# Altium PCB Motherboard.PcbDoc (part 2 of 2)
Units mm, origin at the board's own origin, x right, y up, seen from the top; angles counter-clockwise.
Board outline 237.88 x 115.44 mm, 4 copper layers (Top Layer, GND, 3V3, Bottom Layer), stack 0.603 mm thick; 165 components, 86 nets, 532 pads, 772 vias.
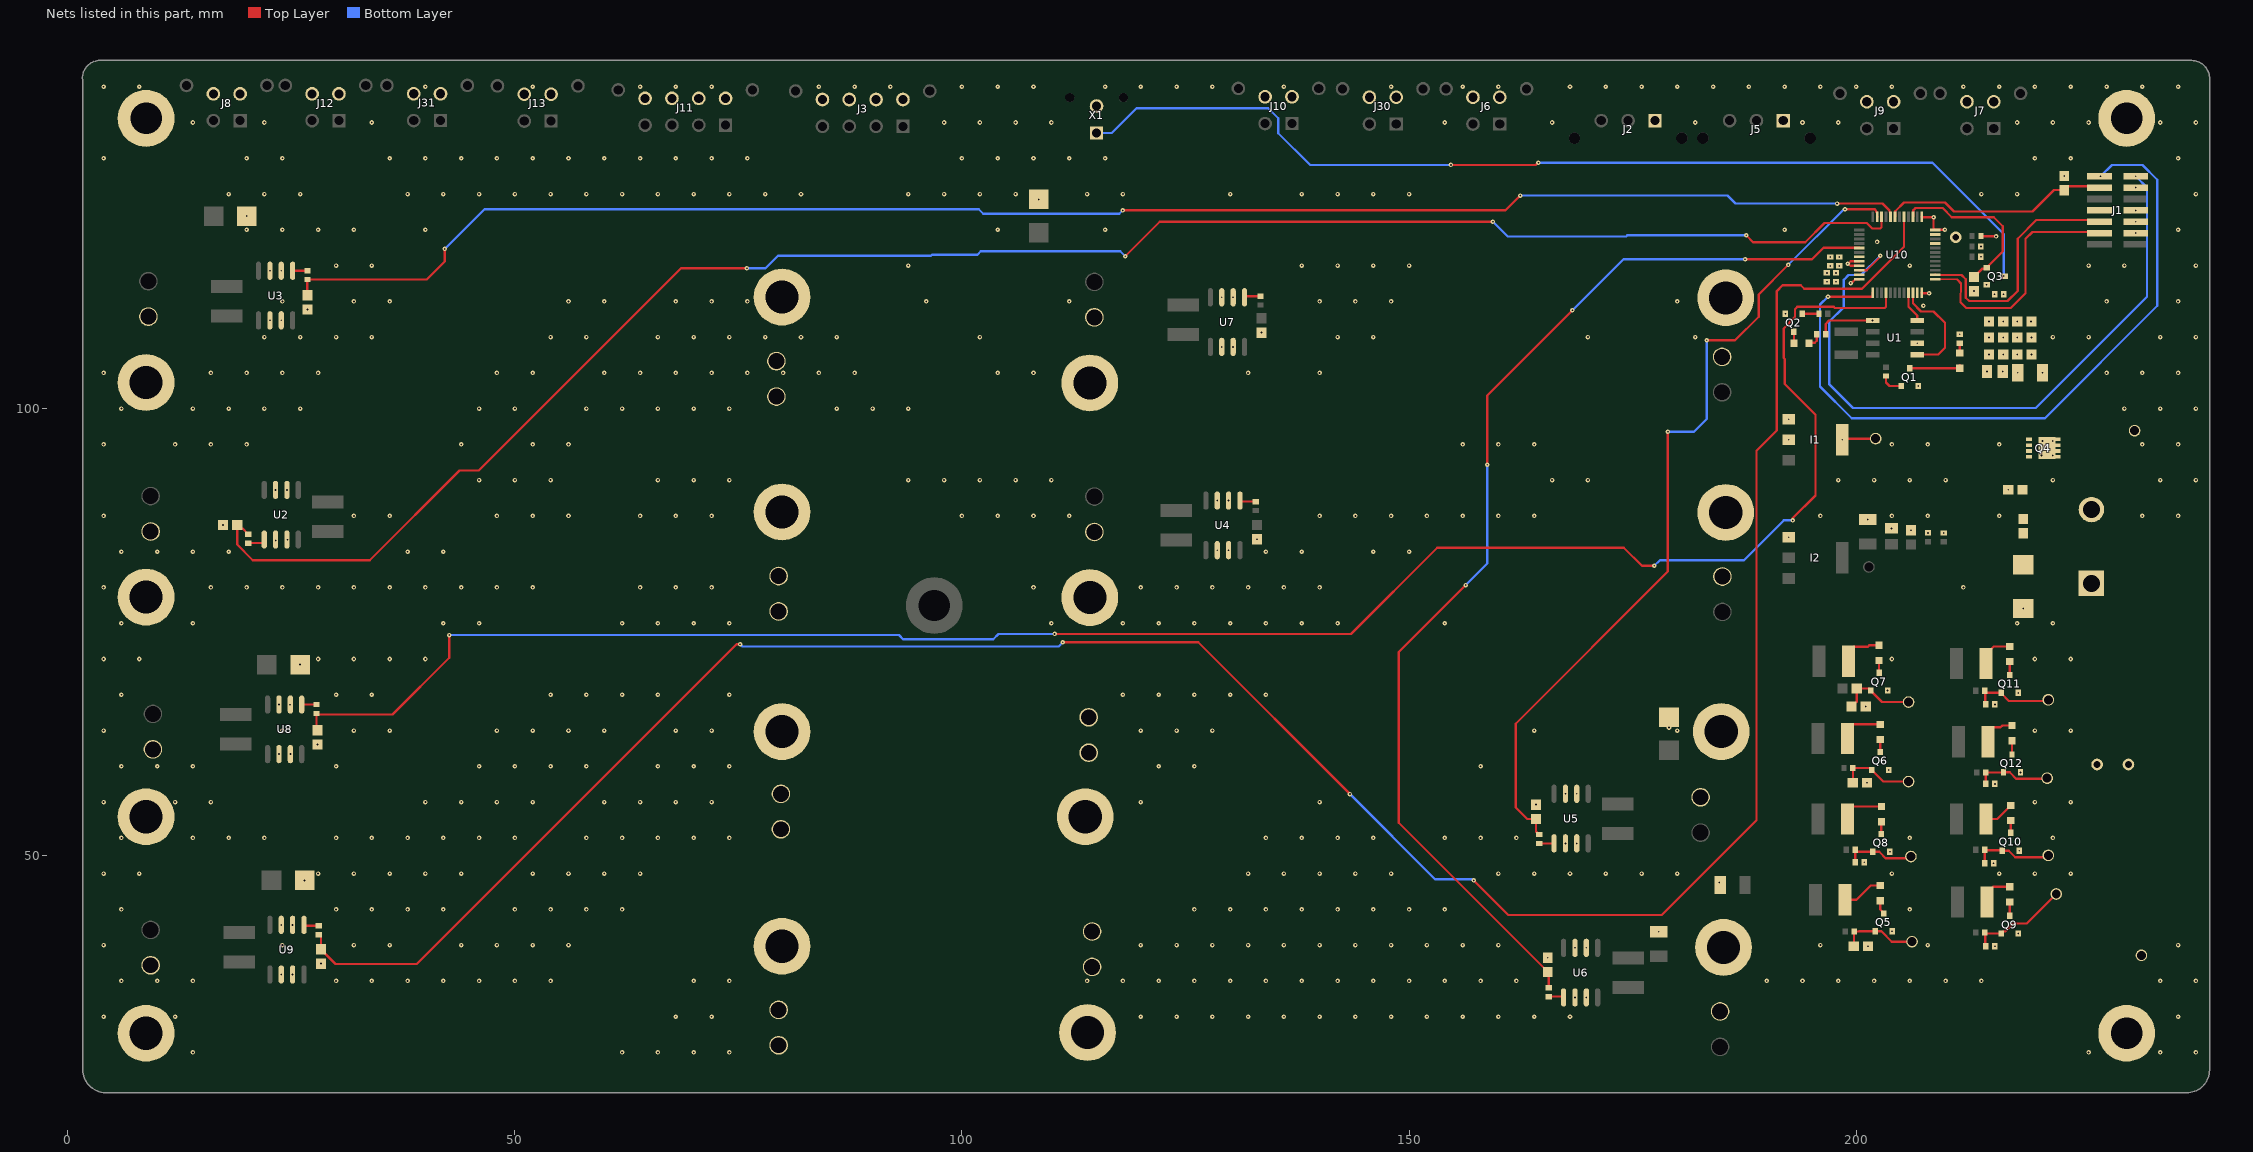
[diagram p4: the nets of this part, all layers, seen from the top]

## Via types
v1: diameter 0.506, hole 0.206, Top Layer to Bottom Layer, 533 vias
v2: diameter 0.508, hole 0.203, Top Layer to Bottom Layer, 204 vias
v3: diameter 1.27, hole 0.7, Top Layer to Bottom Layer, 34 vias
v4: diameter 1.27, hole 0.711, Top Layer to Bottom Layer, 1 vias

## Nets (pads, with @x,y where several pads share a name; then routed paths per layer and width w, separated by ;. In a path a pad name is that pad's centre, name@x,y a point inside that pad or via, vN(x,y) a via of type N, cw(c..) or ccw(c..) an arc to the next point about the centre after c; other vN are vias at no path point) (continued)
CURR_7V_BUCK: C5.1 R16.2 U10.17 | length 125.7
  Top Layer w0.254: v2(156.337,80.264) 148.844,72.771 148.844,53.683 165.506,37.021 C5.1@165.506,36.996 165.633,36.869 R16.2@165.633,35.248 ; v2(158.75,93.726) 158.75,101.473 v2(168.275,110.998) ; v2(187.579,116.713) 195.072,116.713 196.342,117.983 200.335,117.983 U10.17@200.347,117.971
  Bottom Layer w0.254: v2(156.337,80.264) 158.75,82.677 v2(158.75,93.726) ; v2(168.275,110.998) 173.99,116.713 v2(187.579,116.713)
CURR_12V_BUCK: C4.1 R15.2 U10.11 | length 94.8
  Top Layer w0.254: R15.2@164.567,52.369 164.517,52.369 164.186,52.7 C4.1@164.186,54.117 163.205,54.117 161.925,55.397 161.925,64.77 178.943,81.788 v2(178.943,97.409) ; v2(183.286,107.646) 186.461,107.646 189.103,110.288 189.103,112.776 v2(192.405,116.078) ; v2(198.755,122.301) 202.09,122.301 202.228,122.163 202.228,122.034 202.322,121.941 202.322,121.496 U10.11@202.347,121.471
  Bottom Layer w0.254: v2(178.943,97.409) 181.864,97.409 183.286,98.831 v2(183.286,107.646) ; v2(192.405,116.078) 198.579,122.252 198.706,122.252 v2(198.755,122.301)
CURR_12V_BUCK_FANS: C8.1 R20.2 U10.28 | length 218.3
  Top Layer w0.254: C8.1@27.94,64.046 27.813,64.173 R20.2@27.813,65.913 27.94,65.786 36.322,65.786 42.672,72.136 v2(42.672,74.676) ; v2(110.363,74.803) 116.691,74.803 143.51,74.803 153.162,84.455 174.023,84.455 176.055,82.423 v2(177.419,82.423) ; v2(192.913,87.503) 192.913,87.757 195.453,90.297 195.453,99.314 192.024,102.743 192.024,105.537 191.897,105.664 191.897,108.966 193.167,110.236 193.167,111.125 193.421,111.379 197.485,111.379 197.612,111.252 203.198,111.252 203.347,111.401 U10.28@203.347,112.971
  Bottom Layer w0.254: v2(42.672,74.676) 92.964,74.676 93.42,74.22 103.49,74.22 104.074,74.803 v2(110.363,74.803) ; v2(177.419,82.423) 178.054,83.058 187.452,83.058 191.897,87.503 v2(192.913,87.503)
CURR_18V_BUCK: C2.1 R10.2 U10.8 | length 185.2
  Top Layer w0.254: C2.1@26.797,112.687 26.797,114.427 R10.2@26.797,114.435 40.14,114.435 42.164,116.459 v2(42.164,117.856) ; v2(117.983,122.174) 160.782,122.174 v2(162.433,123.825) ; v2(197.866,122.936) 202.955,122.936 203.728,122.163 203.728,122.034 203.822,121.941 203.822,121.496 U10.8@203.847,121.471
  Bottom Layer w0.254: v2(42.164,117.856) 46.609,122.301 101.883,122.301 102.391,121.793 117.602,121.793 v2(117.983,122.174) ; v2(162.433,123.825) 185.605,123.825 186.494,122.936 v2(197.866,122.936)
CURR_24V_BUCK: C1.1 R9.2 U10.10 | length 208
  Top Layer w0.254: C1.1@18.961,86.868 19.232,86.597 19.559,86.597 R9.2@20.193,85.963 ; C1.1@18.961,86.995 18.951,86.985 18.951,84.808 20.701,83.058 33.782,83.058 43.815,93.091 45.974,93.091 68.58,115.697 v2(75.946,115.697) ; v2(118.262,117.044) 122.122,120.904 v2(159.385,120.904) ; v2(187.706,119.38) 188.468,118.618 194.31,118.618 196.458,120.766 201.179,120.766 201.803,120.142 202.692,120.142 202.847,120.297 U10.10@202.847,121.471
  Bottom Layer w0.254: v2(75.946,115.697) 78.041,115.697 79.438,117.094 96.52,117.094 96.647,117.221 101.727,117.221 102.108,117.602 117.704,117.602 v2(118.262,117.044) ; v2(159.385,120.904) 161.036,119.253 174.273,119.253 174.4,119.38 v2(187.706,119.38)
CURR_24V_BUCK_LA: C7.1 R21.2 U10.5 | length 275.2
  Top Layer w0.254: R21.2@28.067,41.156 28.117,41.156 28.321,40.952 C7.1@28.321,39.535 28.321,39.51 29.947,37.884 39.027,37.884 74.798,73.655 75.179,73.655 v2(75.184,73.66) ; v2(111.277,73.864) 126.415,73.864 v2(143.383,56.896) ; v2(157.226,47.244) 161.086,43.384 178.258,43.384 188.849,53.975 188.849,95.294 191.135,97.58 191.135,113.152 191.775,113.792 193.802,113.792 194.183,113.411 200.66,113.411 205.359,118.11 205.359,121.459 U10.5@205.347,121.471
  Bottom Layer w0.254: v2(75.184,73.66) 75.206,73.66 75.46,73.406 110.819,73.406 v2(111.277,73.864) ; v2(143.383,56.896) 152.905,47.374 157.027,47.374 157.157,47.244 v2(157.226,47.244)
FDCAN_RX: U1.4 U10.33 | length 3.5
  Top Layer w0.254: U10.33@205.847,112.971 205.847,111.399 206.843,110.403 U1.4@206.843,109.855
FDCAN_TX: U1.1 U10.34 | length 11.9
  Top Layer w0.254: U10.34@206.347,112.971 206.347,111.788 207.264,110.871 208.661,110.871 209.931,109.601 209.931,106.807 209.169,106.045 U1.1@206.843,106.045
GND: C1.2 C2.2 C3.2 C4.2 C5.2 C6.2 C7.2 C8.2 C9.1 C10.1 C11.1 C12.1 C13.1 C14.1 C15.1 C16.1 C17.1 C18.1 C19.1 C20.1 C21.1 C22.1 C23.1 C24.1 C25.1 C26.1 C27.1 C28.1 C29.1 C30.2 D3.2 D12.2 D13.2 D14.2 D15.2 D16.2 GND.1 I1.1 I2.1 J1.05 J1.07 J1.11 J2.P$1 J3.5 J3.6 J3.7 J3.8 J5.P$1 J6.3 J6.4 J7.3 J7.4 J8.3 J8.4 J9.3 J9.4 J10.3 J10.4 J11.5 J11.6 J11.7 J11.8 J12.3 J12.4 J13.3 J13.4 J14.2 J15.2 J16.2 J17.2 J18.2 J19.2 J20.2 J21.2 J22.2 J23.2 J24.2 J25.2 J26.2 J27.2 J28.2 J29.2 J30.3 J30.4 J31.3 J31.4 pad.3@8.763,30.149 pad.3@8.763,54.355 pad.3@8.763,78.918 pad.3@8.763,102.921 pad.3@8.763,132.461 pad.3@79.883,39.877 pad.3@79.883,63.88 pad.3@79.883,88.443 pad.3@79.883,112.471 pad.3@113.792,54.356 pad.3@114.3,78.867 pad.3@114.3,102.87 pad.3@114.046,30.226 pad.3@184.912,63.881 pad.3@185.42,88.392 pad.3@185.42,112.395 pad.3@185.166,39.751 pad.3@230.251,30.149 pad.3@230.251,132.461 Q1.2 Q2.2 Q3.2 Q4.3 Q5.2 Q6.2 Q7.2 Q8.2 Q9.2 Q10.2 Q11.2 Q12.2 R22.1 R27.2 R36.1 R37.1 R38.1 R39.1 R48.1 R49.1 R50.1 R51.1 U1.2 U2.2 U2.3 U3.2 U3.3 U4.2 U4.3 U5.2 U5.3 U6.2 U6.3 U7.2 U7.3 U8.2 U8.3 U9.2 U9.3 U10.19 U10.23 U10.35 U10.45 U10.47 X1.P$2 | length 0.2
  Top Layer w0.254: Q2.2@192.09,110.601 Q2.2@192.12,110.632 ; v2(214.592,113.854) Q3.2@214.608,113.87 Q3.2@214.73,113.749
  other v1: 14,28 62,28 66,28 70,28 74,28 226,28 234,28 238,28 4,32 12,32 68,32 72,32 120,32 124,32 128,32 132,32 136,32 140,32 144,32 148,32 152,32 156,32 160,32 164,32 168,32 236,32 6,36 10,36 14,36 30,36 34,36 38,36 42,36 46,36 50,36 54,36 70,36 74,36 114,36 118,36 122,36 126,36 130,36 134,36 138,36 142,36 146,36 150,36 154,36 158,36 162,36 190,36 194,36 198,36 202,36 206,36 210,36 214,36 234,36 238,36 4,40 24,40 32,40 36,40 44,40 48,40 52,40 56,40 120,40 124,40 128,40 132,40 136,40 140,40 144,40 148,40 152,40 156,40 160,40 196,40 208,40 236,40 6,44 30,44 34,44 38,44 42,44 50,44 54,44 58,44 62,44 126,44 130,44 134,44 138,44 142,44 146,44 150,44 154,44 206,44 4,48 8,48 28,48 32,48 36,48 40,48 44,48 52,48 56,48 60,48 64,48 132,48 136,48 140,48 144,48 148,48 160,48 164,48 168,48 172,48 176,48 180,48 204,48 216,48 220,48 224,48 6,52 14,52 18,52 22,52 30,52 34,52 38,52 42,52 46,52 50,52 58,52 62,52 66,52 70,52 74,52 134,52 138,52 142,52 146,52 154,52 158,52 162,52 206,52 222,52 4,56 12,56 16,56 40,56 44,56 48,56 52,56 60,56 64,56 68,56 72,56 120,56 140,56 220,56 224,56 6,60 10,60 14,60 30,60 46,60 50,60 54,60 58,60 66,60 70,60 74,60 122,60 126,60 158,60 4,64 24,64 32,64 36,64 48,64 52,64 56,64 60,64 68,64 72,64 120,64 124,64 128,64 164,64 180,64 220,64 224,64 6,68 30,68 34,68 54,68 58,68 62,68 66,68 74,68 118,68 122,68 126,68 130,68 134,68 4,72 8,72 28,72 32,72 36,72 40,72 204,72 220,72 224,72 6,76 14,76 42,76 46,76 62,76 66,76 70,76 74,76 110,76 118,76 122,76 126,76 130,76 134,76 138,76 142,76 154,76 218,76 222,76 4,80 16,80 20,80 24,80 28,80 32,80 36,80 40,80 44,80 48,80 52,80 64,80 68,80 72,80 108,80 120,80 124,80 128,80 132,80 136,80 140,80 212,80 6,84 10,84 14,84 18,84 38,84 42,84 134,84 138,84 146,84 150,84 4,88 32,88 36,88 48,88 52,88 56,88 64,88 68,88 72,88 100,88 104,88 108,88 112,88 140,88 144,88 148,88 152,88 156,88 160,88 164,88 196,88 204,88 208,88 216,88 232,88 236,88 46,92 50,92 54,92 66,92 70,92 74,92 94,92 98,92 102,92 106,92 110,92 166,92 170,92 198,92 202,92 206,92 210,92 222,92 234,92 238,92 4,96 12,96 16,96 20,96 44,96 52,96 56,96 156,96 160,96 164,96 204,96 208,96 216,96 232,96 236,96 6,100 14,100 18,100 22,100 26,100 46,100 50,100 58,100 62,100 66,100 70,100 74,100 86,100 90,100 94,100 230,100 234,100 238,100 4,104 16,104 20,104 24,104 28,104 48,104 52,104 60,104 64,104 68,104 72,104 76,104 80,104 84,104 88,104 104,104 108,104 132,104 140,104 228,104 232,104 236,104 22,108 26,108 30,108 34,108 54,108 58,108 66,108 70,108 74,108 78,108 82,108 86,108 102,108 142,108 146,108 170,108 182,108 222,108 226,108 234,108 238,108 24,112 32,112 36,112 56,112 60,112 68,112 72,112 76,112 96,112 112,112 140,112 144,112 148,112 180,112 228,112 236,112 30,116 34,116 94,116 138,116 142,116 146,116 150,116 206,116 226,116 230,116 238,116 20,120 24,120 28,120 32,120 40,120 104,120 116,120 192,120 236,120 18,124 22,124 26,124 38,124 42,124 46,124 50,124 54,124 58,124 62,124 66,124 70,124 74,124 78,124 82,124 94,124 98,124 102,124 106,124 114,124 118,124 130,124 138,124 142,124 146,124 150,124 214,124 218,124 238,124 4,128 20,128 24,128 36,128 40,128 44,128 48,128 52,128 56,128 60,128 64,128 68,128 72,128 76,128 100,128 104,128 108,128 112,128 116,128 220,128 224,128 236,128 14,132 22,132 34,132 98,132 102,132 106,132 110,132 154,132 166,132 182,132 194,132 198,132 218,132 222,132 226,132 234,132 238,132 4,136 8,136 40,136 52,136 64,136 68,136 72,136 84,136 88,136 92,136 100,136 104,136 108,136 116,136 120,136 124,136 128,136 136,136 148,136 156,136 160,136 168,136 172,136 176,136 180,136 184,136 188,136 192,136 196,136 200,136 204,136 212,136 216,136 220,136 224,136 228,136 232,136 236,136
  other v2: 23.876,36.725 25.146,36.725 28.321,37.935 165.506,38.596 168.554,39.701 169.824,39.701 201.333,39.878 215.511,39.878 218.12,41.291 177.927,41.507 204.023,41.545 184.68,46.99 26.492,47.244 215.376,49.149 200.906,49.276 203.769,50.435 218.247,50.562 164.186,55.717 167.488,56.927 168.758,56.927 215.511,58.039 201.206,58.166 218.374,59.325 203.642,59.595 23.622,61.363 24.892,61.363 27.94,62.446 179.07,64.338 201.079,66.675 215.511,66.929 218.12,68.215 203.515,68.469 25.984,71.374 218.694,77.653 128.549,84.173 129.819,84.173 132.994,85.383 192.453,85.612 208.026,86.106 209.804,86.098 206.121,86.398 203.962,86.605 17.361,86.995 201.295,87.608 23.241,90.91 24.511,90.91 217.005,90.932 220.726,94.742 221.996,94.742 221.369,95.59 220.853,96.393 221.996,96.393 192.453,98.82 206.944,102.521 220.831,104.013 214.639,104.14 214.846,106.045 219.621,106.045 129.057,106.906 130.327,106.906 206.843,107.315 214.846,107.95 219.621,107.95 133.502,108.497 214.846,109.728 219.561,109.745 22.606,109.877 23.876,109.877 192.105,110.616 26.797,111.087 207.518,111.506 215.49,112.788 213.195,113.157 196.723,114.181 197.739,114.181 197.104,116.959 198.12,116.959 202.335,118.642 231.27,120.904 20.015,121.539 231.27,122.174 108.585,123.393 231.27,124.714 223.266,126.022
  other v4: 211.156,119.171
Net3V3_1: 3V3.1 R43.1 | length 4
  Top Layer w0.254: R43.1@214.756,62.738 214.756,63.763 215.354,64.361 216.15,64.361 216.355,64.567 3V3.1@217.424,64.567
Net3V3_2: 3V3.2 Q12.3 | length 1.5
  Top Layer w0.254: Q12.3@217.424,61.325 3V3.2@217.424,62.865
Net5V_1: 5V.1 R42.1 | length 4.1
  Top Layer w0.254: R42.1@214.502,71.501 214.502,72.526 215.382,73.406 5V.1@217.17,73.406
Net5V_2: 5V.2 Q11.3 | length 1.5
  Top Layer w0.254: Q11.3@217.17,70.215 5V.2@217.17,71.704
Net7V_1: 7V.1 R40.1 | length 3.8
  Top Layer w0.254: R40.1@214.629,44.831 214.629,45.856 215.306,46.533 7V.1@217.17,46.533
Net7V_2: 7V.2 Q9.3 | length 1.5
  Top Layer w0.254: Q9.3@217.17,43.291 7V.2@217.17,44.831
Net12V-0_1: 12V.1 R31.1 | length 4.9
  Top Layer w0.254: R31.1@199.008,54.102 199.008,54.901 199.606,55.499 12V.1@202.819,55.499
Net12V-0_2: 12V.2 Q8.3 | length 1.4
  Top Layer w0.254: Q8.3@202.819,52.435 12V.2@202.819,53.797
Net12V-1_1: 12V-1.1 R41.1 | length 3.4
  Top Layer w0.254: R41.1@214.502,54.102 215.773,54.102 12V-1.1@217.297,55.626
Net12V-1_2: 12V-1.2 Q10.3 | length 1.4
  Top Layer w0.254: Q10.3@217.297,52.562 12V-1.2@217.297,53.924
Net18V_1: 18V.1 R30.1 | length 4.8
  Top Layer w0.254: R30.1@199.135,71.755 199.135,72.78 199.733,73.378 201.316,73.378 201.471,73.533 18V.1@202.565,73.533
Net18V_2: 18V.2 Q7.3 | length 1.4
  Top Layer w0.254: Q7.3@202.565,70.469 18V.2@202.565,71.831
Net24V-0_1: 24V.1 R28.1 | length 4.6
  Top Layer w0.254: R28.1@198.754,45.085 200.048,45.085 201.623,46.66 24V.1@202.692,46.66
Net24V-0_2: 24V.2 Q5.3 | length 1.6
  Top Layer w0.254: 24V.2@202.692,44.958 202.692,43.976 203.073,43.595 Q5.3@203.073,43.545
Net24V-1_1: 24V-1.1 R29.1 | length 4.7
  Top Layer w0.254: R29.1@199.008,63.373 199.008,64.096 199.606,64.694 24V-1.1@202.692,64.694
Net24V-1_2: 24V-1.2 Q6.3 | length 1.4
  Top Layer w0.254: Q6.3@202.692,61.595 24V-1.2@202.692,62.992
NetJ4_2: J4.2 Q4.2
NetQ1_1: Q1.1 R1.1 | length 2.6
  Top Layer w0.254: R1.1@203.327,103.648 203.327,102.935 203.741,102.521 Q1.1@205.044,102.521
NetQ1_3: Q1.3 TX.2 | length 5.7
  Top Layer w0.254: Q1.3@205.994,104.505 211.236,104.505 TX.2@211.582,104.851
NetQ2_1: Q2.1 R2.1 | length 1.8
  Top Layer w0.254: Q2.1@194.036,110.617 R2.1@195.842,110.617
NetQ2_3: Q2.3 RX.2 | length 1.2
  Top Layer w0.254: RX.2@193.04,107.315 Q2.3@193.04,108.525
NetQ4_1: Q4.1 R26.2 R27.1
NetR4_1: R4.1 TX.1 | length 1.1
  Top Layer w0.254: TX.1@211.582,106.223 R4.1@211.582,107.323
NetR5_1: R5.1 RX.1 | length 1.9
  Top Layer w0.254: RX.1@194.742,107.315 194.79,107.363 195.374,107.363 195.596,107.585 R5.1@195.596,108.323 ; R5.1@195.588,108.196 R5.1@195.715,108.069
NetR9_1: R9.1 U2.5 | length 1.8
  Top Layer w0.254: R9.1@20.193,84.963 21.817,84.963 U2.5@21.971,85.117
NetR10_1: R10.1 U3.5 | length 1.7
  Top Layer w0.254: U3.5@25.146,115.421 25.16,115.435 R10.1@26.797,115.435
NetR11_1: R11.1 U4.5 | length 1.8
  Top Layer w0.254: U4.5@131.089,89.717 131.202,89.604 R11.1@132.867,89.604
NetR15_1: R15.1 U5.5 | length 1.7
  Top Layer w0.254: R15.1@164.567,51.369 166.204,51.369 U5.5@166.218,51.382
NetR16_1: R16.1 U6.5 | length 1.7
  Top Layer w0.254: R16.1@165.633,34.248 167.192,34.248 U6.5@167.284,34.156
NetR17_1: R17.1 U7.5 | length 1.8
  Top Layer w0.254: U7.5@131.597,112.45 131.73,112.583 R17.1@133.375,112.583
NetR20_1: R20.1 U8.5 | length 1.7
  Top Layer w0.254: U8.5@26.162,66.907 26.168,66.913 R20.1@27.813,66.913
NetR21_1: R21.1 U9.5 | length 1.7
  Top Layer w0.254: U9.5@26.416,42.269 26.529,42.156 R21.1@28.067,42.156
NRST: C29.2 J1.12 U10.7 | length 25.5
  Top Layer w0.254: U10.7@204.347,121.471 204.372,121.496 204.372,122.076 205.359,123.063 209.931,123.063 210.947,122.047 219.71,122.047 222.123,124.46 C29.2@223.266,124.46 ; C29.2@223.266,124.422 223.266,124.447 223.689,124.87 227.044,124.87 J1.12@227.2,124.714
PGOOD_0: PG0.1 Q5.1 R32.1 R36.2 | length 8.6
  Top Layer w0.254: R36.2@199.733,39.878 199.771,39.916 R32.1@199.771,41.529 200.317,41.529 200.333,41.545 Q5.1@202.123,41.545 202.834,41.545 203.993,40.386 PG0.1@206.248,40.386
PGOOD_1: PG1.1 Q6.1 R33.1 R37.2 | length 8.6
  Top Layer w0.254: R37.2@199.606,58.166 199.636,58.196 R33.1@199.636,59.817 201.569,59.817 201.742,59.644 Q6.1@201.742,59.595 201.742,59.545 201.915,59.372 201.965,59.372 203.044,58.293 PG1.1@205.867,58.293
PGOOD_2: PG2.1 Q7.1 R34.1 R38.2 | length 8.8
  Top Layer w0.254: R38.2@199.479,66.675 199.504,66.675 200.063,67.234 R34.1@200.063,68.707 201.427,68.707 201.615,68.519 Q7.1@201.615,68.469 201.615,68.419 201.788,68.246 201.838,68.246 202.901,67.183 PG2.1@205.867,67.183
PGOOD_3: PG3.1 Q8.1 R35.1 R39.2 | length 8.1
  Top Layer w0.254: R35.1@199.89,50.623 200.063,50.45 200.113,50.45 200.128,50.435 Q8.1@201.869,50.435 202.58,50.435 203.311,49.704 205.631,49.704 205.838,49.911 PG3.1@206.121,49.911 ; R35.1@199.89,50.673 199.898,50.665 199.898,49.284 R39.2@199.906,49.276
PGOOD_4: PG4.1 Q9.1 R44.1 R48.2 | length 11.4
  Top Layer w0.254: R44.1@214.368,41.402 214.368,41.352 R44.1@214.439,41.28 ; R44.1@214.492,41.227 R44.1@214.439,41.28 ; R48.2@214.511,39.878 214.439,39.95 214.439,41.164 R44.1@214.439,41.28 ; R44.1@214.556,41.291 Q9.1@216.22,41.291 216.22,41.341 216.393,41.514 216.647,41.514 217.551,42.418 219.075,42.418 PG4.1@222.415,45.758
PGOOD_5: PG5.1 Q10.1 R46.1 R49.2 | length 9.1
  Top Layer w0.254: R49.2@214.376,49.149 214.372,49.153 214.372,50.669 R46.1@214.368,50.673 214.423,50.618 216.291,50.618 Q10.1@216.347,50.562 217.058,50.562 217.789,49.831 220.998,49.831 221.205,50.038 PG5.1@221.488,50.038
PGOOD_6: PG6.1 Q11.1 R45.1 R50.2 | length 9.2
  Top Layer w0.254: R45.1@214.368,68.403 214.556,68.215 Q11.1@216.22,68.215 ; R45.1@214.368,68.453 214.439,68.381 214.439,67.001 R50.2@214.511,66.929 ; Q11.1@216.22,68.165 217.075,67.31 221.361,67.31 PG6.1@221.488,67.437
PGOOD_7: PG7.1 Q12.1 R47.1 R51.2 | length 8.5
  Top Layer w0.254: R51.2@214.511,58.039 214.503,58.047 214.503,59.301 R47.1@214.495,59.309 214.503,59.317 216.466,59.317 Q12.1@216.474,59.325 217.185,59.325 217.916,58.594 221.281,58.594 PG7.1@221.361,58.674
RA_LASER_GND: Q3.3 X1.P$1 | length 114.3
  Top Layer w0.254: v2(154.686,127.254) 164.142,127.254 164.396,127.508 v2(164.465,127.508)
  Bottom Layer w0.254: X1.P$1@115.053,130.836 116.739,130.836 119.507,133.604 134.239,133.604 135.382,132.461 135.382,130.81 138.938,127.254 v2(154.686,127.254) ; v2(164.465,127.508) 208.534,127.508 216.504,119.538 v2(216.504,114.848)
RA_LASER_MCU: Q3.1 R22.2 U10.3 | length 19
  Top Layer w0.254: U10.3@206.347,121.471 206.372,121.496 206.372,122.171 206.629,122.428 209.677,122.428 210.693,121.412 215.392,121.412 216.408,120.396 216.408,117.57 214.832,115.993 214.832,115.943 Q3.1@214.585,115.697 ; R22.2@213.195,114.731 213.195,114.756 214.069,115.63 214.468,115.63 Q3.1@214.608,115.77
STLINK_RX: J1.13 U10.22 | length 76.4
  Top Layer w0.254: U10.22@200.347,115.471 201.196,115.471 202.643,116.918 202.643,117.045 v2(202.692,117.094)
  Bottom Layer w0.254: v2(202.692,117.094) 200.533,114.935 199.136,114.935 198.628,114.427 198.628,111.379 196.977,109.728 196.977,102.743 199.644,100.076 220.091,100.076 232.514,112.499 232.514,124.737 v2(231.267,125.984)
STLINK_TX: J1.14 U10.25 | length 81.9
  Top Layer w0.254: v2(196.85,112.522) 201.822,112.522 201.847,112.547 U10.25@201.847,112.971
  Bottom Layer w0.254: v2(196.85,112.522) 195.961,111.633 195.961,102.489 199.517,98.933 221.107,98.933 233.68,111.506 233.68,125.603 232.029,127.254 228.6,127.254 v2(227.33,125.984)
SWCLK: J1.06 U10.38 | length 28
  Top Layer w0.254: U10.38@208.847,114.971 209.317,114.95 211.796,114.95 212.264,114.481 212.264,112.399 212.637,112.026 216.928,112.026 218.059,113.157 218.059,118.999 220.154,121.094 227.01,121.094 J1.06@227.2,120.904
SWDIO: J1.04 U10.37 | length 28.1
  Top Layer w0.254: U10.37@208.848,114.5 211.304,114.432 ; 211.305,114.446 211.729,113.997 211.672,111.903 212.323,111.252 217.297,111.252 218.948,112.903 218.948,118.999 219.71,119.761 227.073,119.761 J1.04@227.2,119.634
SWO: J1.08
VBAT: C30.1 D3.1 J4.1 J18.1 J19.1 J21.1 J26.1 J27.1 J28.1 R26.1 VBAT.1
VBAT_MCU: 3V3_LDO.1 C14.2 C17.2 C18.2 C19.2 C20.2 C21.2 C22.2 C23.2 C24.2 C25.2 C26.2 C27.2 C28.2 I1.2 I1.4 J1.03 R4.2 R5.2 R23.2 R24.2 R25.2 U1.5 U2.6 U2.7 U3.6 U3.7 U4.6 U4.7 U5.6 U5.7 U6.6 U6.7 U7.6 U7.7 U8.6 U8.7 U9.6 U9.7 U10.1 U10.20 U10.21 U10.24 U10.36 U10.48 | length 20.7
  Top Layer w0.254: R5.2@196.596,108.323 196.596,109.474 196.977,109.855 v2(201.843,109.855) ; v2(198.453,96.52) 198.58,96.647 3V3_LDO.1@202.184,96.647 ; v2(199.06,116.205) 199.129,116.205 199.363,115.971 U10.21@200.347,115.971 ; v2@199.136,116.205 199.402,116.471 U10.20@200.347,116.471 ; v2(199.39,114.046) 199.439,114.095 199.526,114.095 199.903,114.471 U10.24@200.347,114.471 ; U10.36@207.347,112.971 207.347,112.928 207.372,112.903 v2(208.153,112.903) ; U10.1@207.347,121.471 207.347,121.437 207.372,121.412 v2(208.661,121.412) 208.661,120.182 208.828,120.015 v2(209.931,120.015) ; R23.2@213.957,119.294 213.978,119.274 215.625,119.274 v2(215.646,119.253)
  other v2: 168.554,34.156 169.824,34.156 23.876,42.269 25.146,42.269 167.488,51.382 168.758,51.382 24.837,66.881 23.622,66.907 23.266,85.237 24.567,85.342 128.549,89.717 129.819,89.717 192.453,96.52 218.081,104.013 216.399,104.14 216.446,106.045 218.021,106.045 216.446,107.95 218.021,107.95 211.582,108.323 216.446,109.728 218.021,109.728 129.057,112.45 130.327,112.45 216.489,112.788 196.723,115.181 197.751,115.181 22.606,115.421 23.876,115.421 197.104,115.959 198.12,115.959 213.949,116.979 213.949,118.137 231.27,119.634
pads on no net: J1.01 J1.02 J1.09 J1.10 J2.1 J3. J5.1 J6.1@154.147,135.766 J6.1@163.147,135.766 J7.1@209.392,135.258 J7.1@218.392,135.258 J8.1@13.28,136.147 J8.1@22.28,136.147 J9.1@198.192,135.258 J9.1@207.192,135.258 J10.1@130.906,135.814 J10.1@139.906,135.814 J11. J12.1@24.329,136.147 J12.1@33.329,136.147 J13.1@48.054,136.099 J13.1@57.054,136.099 J30.1@142.566,135.766 J30.1@151.566,135.766 J31.1@35.687,136.15 J31.1@44.687,136.15 U2.4 U3.4 U4.4 U5.4 U6.4 U7.4 U8.4 U9.4 U10.2 U10.4 U10.6 U10.9 U10.12 U10.13 U10.14 U10.15 U10.18 U10.27 U10.29 U10.39 U10.40 U10.41 U10.46 X1.1

## Polygon pours and split planes (outlines as drawn)
GND on Top Layer "GND_L01_P120" (solid, remove dead copper, pour order 120): 4.191,23.495 cw(c4.318,26.162) 1.651,26.289 1.651,136.779 cw(c3.62,136.969) 3.429,138.938 237.363,138.938 cw(c237.49,136.906) 239.522,137.033 239.522,26.035 cw(c236.982,26.035) 236.982,23.495
12V_REST_C on Top Layer "Top Layer-12V_REST_C" (solid, pour order 114): 163.576,98.806 163.322,99.06 163.322,100.33 163.322,102.997 164.465,104.14 187.198,104.14 188.214,103.124 188.214,69.469 186.182,67.437 178.181,67.437 175.514,64.77 175.514,58.039 175.133,57.658 175.006,57.404 170.18,57.404 168.783,58.801 168.783,70.358 179.451,81.026 179.451,98.044 178.689,98.806
12V_ELSE_IN on Top Layer "Top Layer-12V_ELSE_IN" (solid, pour order 109): 182.88,50.292 184.531,51.943 184.531,53.213 183.642,54.102 182.372,54.102 181.229,55.245 181.229,58.42 180.213,59.436 180.213,61.773 177.927,61.773 177.927,59.309 176.86,58.242 176.86,57.15 176.53,56.82 176.53,55.88 175.133,54.483 171.958,54.483 170.434,52.959 169.545,52.959 169.291,52.705 169.291,50.038 169.545,49.784 172.593,49.784 173.101,50.292
18V_IN on Top Layer "NONET_L-01_P-001" (solid, pour order 74): 14.478,123.444 17.018,123.444 17.653,122.809 17.653,120.523 16.891,119.761 14.732,119.761 14.097,119.126 14.097,116.713 15.621,115.189 18.796,115.189 20.447,116.84 21.59,116.84 21.844,116.586 21.844,114.173 20.193,112.522 7.874,112.522 6.477,113.919 6.477,116.332 13.589,123.444
12V_FANS_IN on Top Layer "NONET_L-01_P-001" (solid, pour order 73): 7.874,67.056 13.716,72.898 23.114,72.898 23.622,72.39 23.622,68.707 22.987,68.072 22.987,65.405 22.098,64.516 8.636,64.516 7.874,65.278 7.874,66.421
24V_LA_IN on Top Layer "NONET_L-01_P-001" (solid, pour order 68): 23.622,49.149 24.638,48.133 24.638,44.958 23.114,43.434 23.114,41.148 22.352,40.386 8.001,40.386 7.239,41.148 7.239,42.672 13.716,49.149 23.368,49.149
3V3_AUTONLED_C on Top Layer "NONET_L-01_P-001" (solid, pour order 119): 122.047,85.852 122.682,86.487 125.349,86.487 125.73,86.106 125.73,82.931 125.349,82.55 122.301,82.55 122.047,82.804
12V_FANS_C on Top Layer "NONET_L-01_P-001" (solid, pour order 118): 120.142,132.207 120.142,128.524 120.65,128.016 148.844,128.016 150.241,129.413 150.241,132.207 149.352,133.096 121.031,133.096
12V_FANS_C on Top Layer "Top Layer-12V_FANS_C" (solid, pour order 72): 16.764,56.896 16.764,63.627 17.145,64.008 21.717,64.008 22.86,62.865 22.86,59.436 23.876,58.42 32.258,58.42 57.197,83.359 57.197,96.821 58.42,98.044 61.595,98.044 62.865,96.774 62.865,80.264 36.957,54.356 36.703,54.61 19.05,54.61
5V_BUCK_C on Top Layer "Top Layer-5V_BUCK_C" (solid, pour order 60): 93.218,118.745 90.521,118.775 79.756,129.54 39.243,129.54 37.719,131.064 37.719,132.715 38.227,133.223 39.624,133.223 80.518,133.35 84.963,133.35 85.979,132.334 85.979,129.54 92.681,122.838 98.044,122.936 104.013,116.967 107.696,116.967 110.109,114.554 110.109,110.871 113.03,107.95 120.523,107.95 122.174,109.601 126.746,109.601 128.27,108.077 128.27,105.537 127,104.267 117.729,104.267 115.316,106.68 115.189,106.553 105.41,106.553
5V_IN on Top Layer "Top Layer-5V_IN" (solid, pour order 111): 127.127,111.252 127.762,111.252 127.889,111.125 128.27,111.506 128.27,113.284 128.016,113.538 127.381,113.538 127.127,113.792 127.127,115.316 126.238,116.205 117.475,116.205 117.475,116.332 113.03,120.777 107.594,120.777 107.594,118.618 109.728,118.618 112.903,115.443 112.903,113.411 113.792,112.522 120.523,112.522 122.428,110.617 126.492,110.617
24V_BUCK_LA_C on Top Layer "NONET_L-01_P-001" (solid, pour order 115): 173.418,113.728 172.529,113.728 171.45,112.649 171.45,108.077 172.212,107.315 176.784,107.315 177.673,108.204 177.673,111.252 190.373,123.952 211.709,123.952 216.662,128.905 216.662,131.826 215.773,132.715 211.963,132.715 211.074,131.826 211.074,127.889 209.042,125.857 185.547,125.857
NetQ4_1 on Top Layer "NETQ4_1_L01_P021" (solid, remove dead copper, pour order 21): 218.948,94.869 219.71,94.869 219.837,94.742 219.837,87.249 219.456,86.868 218.186,86.868 217.805,87.249 217.805,93.726
NetJ4_2 on Top Layer "Top Layer-NetJ4_1" (solid, remove dead copper, pour order 23): 229.235,86.741 229.235,91.567 227.33,93.472 227.33,98.425 226.441,99.314 220.599,99.314 218.694,97.536 218.694,95.123 218.821,94.996 219.71,94.996 219.837,95.123 219.837,95.631 219.71,95.758 219.71,96.901 220.345,97.536 222.885,97.536 224.663,95.758 224.663,87.122 225.806,85.979 228.473,85.979
7V_BUCK_C on Top Layer "Top Layer-7V_BUCK_C" (solid, pour order 107): 180.34,36.449 182.499,34.29 186.563,34.29 193.548,41.275 193.548,81.534 193.294,81.788 191.516,81.788 191.389,81.915 191.389,89.154 194.056,91.821 194.056,94.615 193.294,95.377 190.246,95.377 189.484,94.615 189.484,51.562 186.309,48.387 186.309,45.974 185.42,45.085 181.864,45.085 179.705,42.926 179.705,40.64 178.689,39.624 172.847,39.624 172.593,39.37 172.593,37.719 173.863,36.449
24V_BUCK_C on Top Layer "Top Layer-24V_BUCK_C" (solid, pour order 93): 24.257,96.393 24.257,92.964 25.273,91.948 25.273,89.408 26.416,88.265 30.861,88.265 38.862,96.266 59.182,116.586 80.518,116.586 103.378,93.726 149.352,93.726 182.118,126.492 203.679,126.492 205.232,128.045 205.232,132.334 204.851,132.715 200.66,132.715 199.898,131.953 199.898,129.54 199.39,129.032 169.672,129.032 140.335,99.695 105.664,99.695 83.439,121.92 49.784,121.92
24V_ELSE_IN on Top Layer "Top Layer-24V_ELSE_IN" (solid, pour order 91): 24.638,86.868 25.146,86.36 25.146,84.074 25.527,83.693 28.956,83.693 31.115,85.852 30.988,85.979 30.988,87.249 30.48,87.757 25.527,87.757 24.13,89.154 21.844,89.154 19.05,91.948 8.509,91.948 7.747,91.186 7.747,89.281 8.382,88.646 19.177,88.646 20.955,86.868
7V_BUCK_C on Top Layer "NONET_L-01_P-001" (solid, pour order 82): 173.101,37.211 172.085,38.227 171.069,38.227 170.561,38.735 170.561,40.64 171.069,41.148 172.847,41.148 174.752,39.243 175.133,39.243 175.133,37.338 175.006,37.211
12V_REST_C on Top Layer "NONET_L-01_P-001" (solid, pour order 80): 175.387,55.372 174.752,54.737 170.561,54.737 169.545,55.753 169.545,58.293 170.18,58.928 174.625,58.928 175.387,58.166 175.387,58.039
18V_BUCK_C on Top Layer "NONET_L-01_P-001" (solid, pour order 76): 21.336,111.506 21.717,111.125 21.717,109.093 21.463,108.839 19.431,108.839 16.637,106.045 5.08,106.045 4.572,106.553 4.572,115.824 4.572,123.444 9.271,128.143 12.192,128.143 14.986,130.937 14.986,132.842 15.621,133.477 17.272,133.477 17.78,133.477 18.288,133.477 20.193,133.477 20.828,132.842 20.828,131.191 13.716,124.079 12.827,124.079 6.096,117.348 6.096,113.03 7.62,111.506 18.923,111.506
7V_IN on Top Layer "Top Layer-7V_IN" (solid, pour order 67): 181.991,29.337 183.896,27.432 185.42,27.432 186.309,28.321 186.309,30.861 185.928,31.242 183.769,31.242 178.816,36.195 171.704,36.195 170.434,34.925 170.434,31.369 170.942,30.861 176.022,30.861 177.546,29.337
3V3_IN on Top Layer "NONET_L-01_P-001" (solid, remove dead copper, pour order 64): 113.411,91.567 112.903,91.059 112.903,89.281 113.792,88.392 119.888,88.392 120.65,87.63 126.492,87.63 127.762,88.9 127.762,90.932 127.127,91.567 115.951,91.567
VBAT on Top Layer "VBAT_L01_P003" (solid, remove dead copper, pour order 3): 217.932,23.749 238.887,44.704 238.887,83.693 237.744,84.836 222.25,84.836 220.345,86.741 217.551,86.741 216.662,85.852 216.662,80.137 217.17,79.629 221.869,79.629 226.314,75.184 226.314,65.024 229.235,62.103 229.235,58.801 226.314,55.88 226.314,46.482 214.376,34.544 194.564,34.544 187.071,27.051 183.134,27.051 182.245,27.94 117.221,27.94 115.951,26.67 112.395,26.67 111.125,27.94 109.093,27.94 108.077,28.956 108.077,34.163 113.665,39.751 115.824,39.751 117.221,41.148 117.221,66.421 80.772,102.87 77.978,102.87 76.327,101.219 76.327,25.273 77.851,23.749
5V_LDO on Top Layer "Top Layer-5V_LDO" (solid, remove dead copper, pour order 44): 194.31,42.926 194.818,42.164 196.342,42.164 197.358,43.18 197.358,73.66 198.501,74.803 206.121,74.803 208.153,72.771 208.153,42.291 208.788,41.656 210.947,41.656 212.598,43.307 212.598,74.295 210.82,76.073 210.82,84.904 210.126,85.598 195.707,85.598 194.31,84.201 191.897,84.201 191.643,83.947 191.643,82.677 191.897,82.423 193.929,82.423 193.929,82.296 194.31,81.915 194.31,43.18
GND on Bottom Layer "GND_L04_P121" (solid, remove dead copper, pour order 121): 4.191,23.495 cw(c4.318,26.162) 1.651,26.289 1.651,136.779 cw(c3.62,136.969) 3.429,138.938 237.363,138.938 cw(c237.49,136.906) 239.522,137.033 239.522,26.035 cw(c236.982,26.035) 236.982,23.495
12V_FANS_C on Bottom Layer "NONET_L-01_P-001" (solid, pour order 117): 120.142,132.08 120.904,132.842 124.333,132.842 125.73,131.445 125.73,98.044 122.174,94.488 65.278,94.488 63.881,93.091 57.912,93.091 57.15,93.853 57.15,96.774 58.42,98.044 117.856,98.044 120.142,100.33
3V3_AUTONLED_C on Bottom Layer "NONET_L-01_P-001" (solid, pour order 116): 82.296,84.709 82.931,85.344 111.633,85.344 112.268,84.709 121.158,84.709 122.809,86.36 124.841,86.36 125.73,85.471 125.73,82.55 125.095,81.915 116.84,81.915 116.205,82.55 82.296,82.55 81.661,83.185 45.466,83.185 38.094,90.557 38.094,116.084 26.035,128.143 26.035,132.715 26.797,133.477 30.861,133.477 32.131,132.207 32.131,125.222 41.275,116.078 41.275,91.186 46.482,85.979 76.708,85.979 77.978,84.709
12V_REST_C on Bottom Layer "NONET_L-01_P-001" (solid, pour order 113): 168.783,104.521 169.545,103.759 169.545,98.679 168.783,97.917 161.671,97.917 151.075,108.513 151.075,120.976 155.956,125.857 155.956,132.08 156.845,132.969 160.782,132.969 161.544,132.207 161.544,124.206 156.464,119.126 156.464,110.363 162.306,104.521
24V_BUCK_LA_C on Bottom Layer "NONET_L-01_P-001" (solid, pour order 42): 16.891,30.099 16.891,38.608 17.526,39.243 20.828,39.243 21.463,38.608 21.463,34.417 22.352,33.528 53.848,33.528 69.596,49.276 117.983,49.276 136.398,67.691 148.082,67.691 171.704,91.313 171.704,107.823 171.45,108.077 171.45,112.649 172.466,113.665 176.53,113.665 177.292,112.903 177.292,83.439 153.797,59.944 139.065,59.944 123.952,44.831 123.825,44.958 77.089,44.958 60.96,28.829 18.161,28.829
GND on GND "GND_L02_P039" (solid, remove dead copper, pour order 39): 4.191,23.495 cw(c4.318,26.162) 1.651,26.289 1.651,136.779 cw(c3.62,136.969) 3.429,138.938 237.363,138.938 cw(c237.49,136.906) 239.522,137.033 239.522,26.035 cw(c236.982,26.035) 236.982,23.495
VBAT_MCU on 3V3 "VBAT_MCU_L03_P040" (solid, remove dead copper, pour order 40): 4.191,23.495 cw(c4.318,26.162) 1.651,26.289 1.651,136.779 cw(c3.62,136.969) 3.429,138.938 237.363,138.938 cw(c237.49,136.906) 239.522,137.033 239.522,26.035 cw(c236.982,26.035) 236.982,23.495

## Silkscreen, mask and mechanical layers (free items; w line width, h text height)
Top Overlay:
  drawing of 2450 lines, arcs and shapes, not listed
  text "GND" at 134.112,128.27 h1
  text "GND" at 145.669,128.27 h1
  text "GND" at 157.353,128.27 h1
  text "GND" at 16.51,128.016 h1
  text "GND" at 27.686,128.016 h1
  text "GND" at 51.181,128.016 h1
  text "GND" at 67.564,128.016 h1
  text "GND" at 87.503,128.016 h1
  text "GND" at 38.989,127.889 h1
  text "GND" at 201.295,127.635 h1
  text "GND" at 212.598,127.508 h1
  text "CANH" at 167.386,127.381 h1
  text "CANL" at 172.339,127.381 h1
  text "GND" at 177.038,127.381 h1
  text "CANH" at 182.626,127.254 h1
  text "CANL" at 187.579,127.254 h1
  text "GND" at 192.278,127.254 h1
  text "GND" at 113.792,126.746 h1
  text "12V" at 134.112,125.857 h1
  text "12V" at 145.669,125.857 h1
  text "12V" at 157.48,125.857 h1
  text "18V" at 16.51,125.603 h1
  text "3V3" at 27.686,125.603 h1
  text "5V" at 51.562,125.603 h1
  text "5V" at 68.072,125.603 h1
  text "5V" at 83.439,125.603 h1
  text "R" at 86.995,125.603 h1
  text "G" at 90.043,125.603 h1
  text "B" at 93.091,125.603 h1
  text "5V" at 39.37,125.476 h1
  text "24V" at 201.295,125.222 h1
  text "24V" at 212.598,125.095 h1
  text "LZR" at 113.792,124.333 h1
  text "FLASHING" at 236.093,118.491 h1 r90
  text "IN" at 65.262,108.855 h5 r270
  text "IN" at 171.332,106.9 h5 r270
  text "18V" at 36.437,104.763 h5
  text "5V" at 105.93,104.128 h5 r90
  text "5V" at 141.237,103.189 h5
  text "18V" at 91.833,101.715 h5 r90
  text "VBAT-" at 214.249,84.201 h1.5 r90
  text "IN" at 65.135,83.328 h5 r270
  text "IN" at 171.078,82.897 h5 r270
  text "24V" at 36.437,80.252 h5
  text "3V3" at 141.237,80.252 h5
  text "24V" at 91.325,77.966 h5 r90
  text "3V3" at 106.311,77.204 h5 r90
  text "VBAT+" at 214.122,76.327 h1.5 r90
  text "IN" at 123.657,66.36 h5 r270
  text "IN" at 65.22,58.87 h5 r270
  text "12V" at 36.437,56.884 h5
  text "12V" at 141.212,56.757 h5
  text "12V" at 93.23,53.201 h5 r90
  text "12V" at 105.93,52.947 h5 r90
  text "IN" at 123.834,42.257 h5 r270
  text "IN" at 65.77,35.068 h5 r270
  text "7V" at 141.237,32.958 h5
  text "7V" at 105.803,32.246 h5 r90
  text "24V" at 36.437,31.738 h5
  text "24V" at 93.357,28.817 h5 r90
  text "AJ EP IL AS" at 208.61,24.587 h1.02
Bottom Overlay:
  drawing of 1227 lines, arcs and shapes, not listed
Mechanical 6:
  lines w0.254: 229.997,138.938 237.363,138.938 cw(c237.49,136.906) 239.522,137.033 239.522,26.035 cw(c236.982,26.035) 236.982,23.495 5.842,23.495 4.191,23.495 cw(c4.318,26.162) 1.651,26.289 1.651,112.395 1.651,136.779 cw(c3.619,136.969) 3.429,138.938 82.423,138.938 230.124,138.938

## Text inside footprints (layer, text, board x,y; h text height)
C30: Top Overlay "+" at 233.699,59.698 h1.02; Mechanical 13 "+" at 233.699,59.698 h1.02